# EAGLE board SNES1Chip_SCIC_IGR_D4_Takt (EAGLE 6.4)
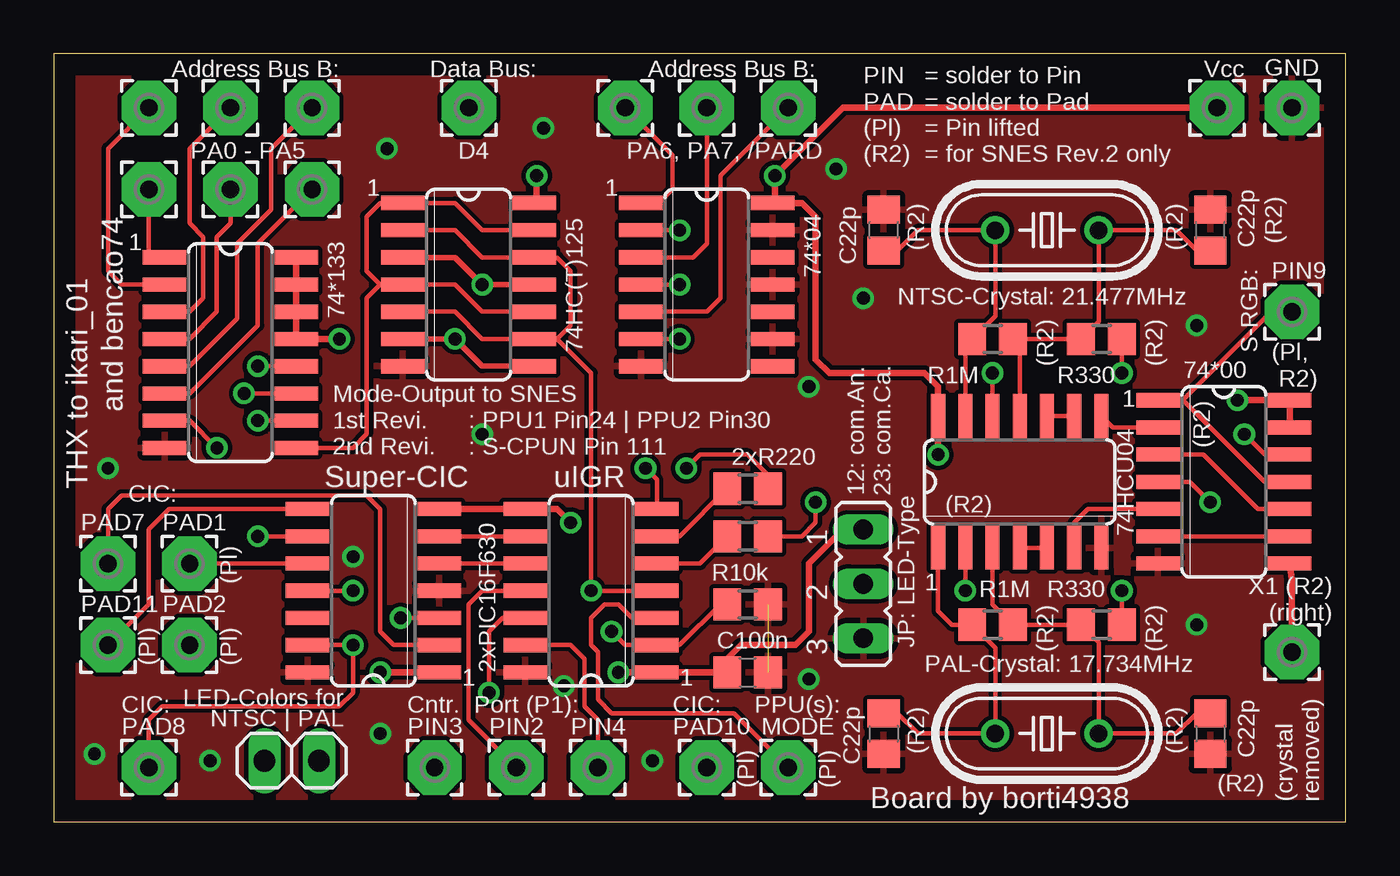
[diagram p0: board, top side]
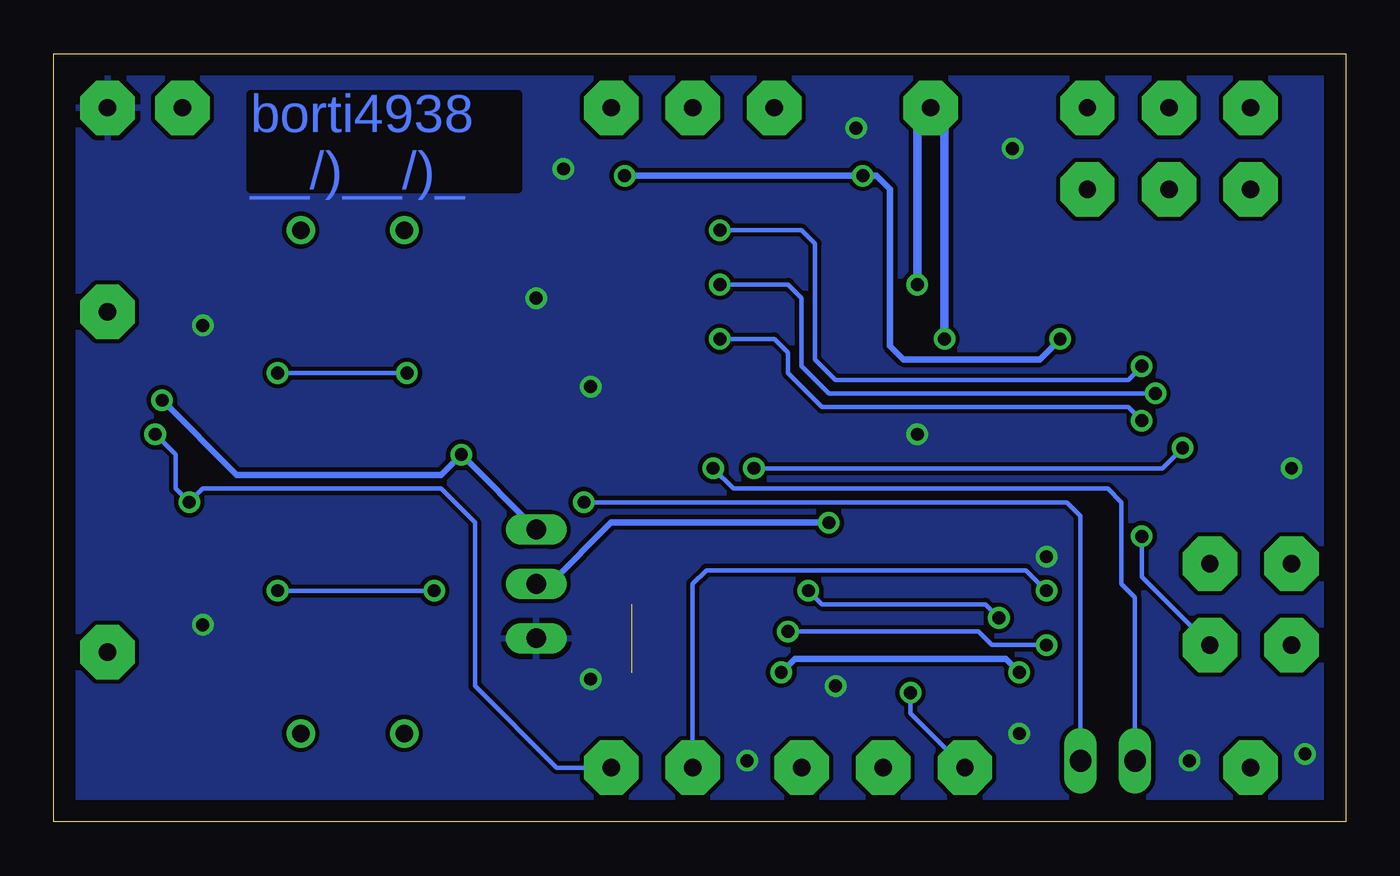
[diagram p1: board, bottom side, seen from below]

Size 60.3 x 35.87 mm. Coordinates in mm from the lower left corner, seen from the top.
Outline: 0,0 60.3,0 60.3,35.87 0,35.87 0,0
Copper layers (1*16): Top 0.035mm / dielectric 1.5mm / Bottom 0.035mm
Design rules "default *": minimum track width 8mil, minimum drill 20mil, track to track 8mil, track to pad 8mil, pad to pad 8mil, via to via 8mil, smd to smd 8mil, copper to edge 40mil, drill to drill 8mil, minimum pad ring 10mil, minimum via ring 8mil, stop-mask expansion 4mil, vias tented up to drill 0mil, thermal gap 10mil

## Footprints (pad centres in the part's own frame; a part is rotated, then mirrored left to right if it is on the bottom)
SO14 = smd 0.66 x 2.032: 1 -3.81,-3.073; 2 -2.54,-3.073; 3 -1.27,-3.073; 4 0,-3.073; 5 1.27,-3.073; 6 2.54,-3.073; 7 3.81,-3.073; 8 3.81,3.073; 9 2.54,3.073; 10 1.27,3.073; 11 0,3.073; 12 -1.27,3.073; 13 -2.54,3.073; 14 -3.81,3.073
SO16 = smd 0.66 x 2.032: 1 -4.445,-3.073; 2 -3.175,-3.073; 3 -1.905,-3.073; 4 -0.635,-3.073; 5 0.635,-3.073; 6 1.905,-3.073; 7 3.175,-3.073; 8 4.445,-3.073; 9 4.445,3.073; 10 3.175,3.073; 11 1.905,3.073; 12 0.635,3.073; 13 -0.635,3.073; 14 -1.905,3.073; 15 -3.175,3.073; 16 -4.445,3.073
2,54/0,8 = drill 0.813 pad 2.54 octagon: 1 0,0
C0805 = smd 1.3 x 1.5: 1 -0.95,0; 2 0.95,0
JP2 = drill 0.914 long: 1 -2.54,0; 2 0,0; 3 2.54,0
1X02 = drill 1.016 long: 1 -1.27,0; 2 1.27,0
HC49/S = drill 0.813: 1 -2.413,0; 2 2.413,0
R0805 = smd 1.3 x 1.5: 1 -0.95,0; 2 0.95,0

## Placement (x,y rotation side)
74*00  [SO14]  54.61,15.88 270 top
74*04  [SO14]  30.48,25.08 270 top
74*133  [SO16]  8.26,21.91 270 top
74HC(T)125  [SO14]  19.37,25.08 270 top
74HCU04  [SO14]  45.09,15.88 0 top
+5V  [2,54/0,8]  54.29,33.34 0 top
/PARD  [2,54/0,8]  34.29,33.34 0 top
C1  C100n  [C0805]  32.38,6.99 0 top
C2  C22p  [C0805]  38.73,4.13 270 top
C3  C22p  [C0805]  53.98,4.13 270 top
C4  C22p  [C0805]  38.73,27.62 90 top
C5  C22p  [C0805]  53.98,27.62 90 top
D4  [2,54/0,8]  19.37,33.34 0 top
GND  [2,54/0,8]  57.78,33.34 0 top
J1-L_TYPE  [JP2]  37.78,11.11 270 top
LED-OUT  [1X02]  11.11,2.86 0 top
MODE  [2,54/0,8]  34.29,2.54 0 top
NTSC:21.477MHZ  [HC49/S]  46.35,27.62 0 top
P0  [2,54/0,8]  12.06,29.53 0 top
P1  [2,54/0,8]  12.06,33.34 0 top
P2  [2,54/0,8]  8.26,29.53 0 top
P3  [2,54/0,8]  8.26,33.34 0 top
P4  [2,54/0,8]  4.45,33.34 0 top
P5  [2,54/0,8]  4.45,29.53 0 top
P6  [2,54/0,8]  26.67,33.34 0 top
P7  [2,54/0,8]  30.48,33.34 0 top
PAD1  [2,54/0,8]  6.35,12.06 0 top
PAD2  [2,54/0,8]  6.35,8.26 0 top
PAD7  [2,54/0,8]  2.54,12.06 0 top
PAD8  [2,54/0,8]  4.45,2.54 0 top
PAD10  [2,54/0,8]  30.48,2.54 0 top
PAD11  [2,54/0,8]  2.54,8.26 0 top
PAL:17.734MHZ  [HC49/S]  46.35,4.13 0 top
PIN2  [2,54/0,8]  21.59,2.54 0 top
PIN3  [2,54/0,8]  17.78,2.54 0 top
PIN4  [2,54/0,8]  25.4,2.54 0 top
PIN9  [2,54/0,8]  57.78,23.81 0 top
R1  R220  [R0805]  32.38,13.34 0 top
R2  R220  [R0805]  32.38,15.56 0 top
R3  R10k  [R0805]  32.38,10.16 180 top
R4  R330  [R0805]  48.9,9.21 180 top
R5  R330  [R0805]  48.9,22.54 180 top
R6  R1M  [R0805]  43.81,9.21 0 top
R7  R1M  [R0805]  43.81,22.54 0 top
RIGHT  [2,54/0,8]  57.78,7.94 0 top
S-CIC  Super-CIC  [SO14]  14.92,10.79 90 top
UIGR  uIGR  [SO14]  25.08,10.79 90 top

## Library data of the parts
74*00 74*04 74*133 74HC(T)125 74HCU04 S-CIC UIGR = 74xx-eu
+5V /PARD D4 GND MODE P0 P1-P7 PAD1 PAD2 PAD7 PAD8 PAD10 PAD11 PIN2-PIN4 PIN9 RIGHT = wirepad
C1-C5 R1-R7 = rcl
J1-L_TYPE = jumper
LED-OUT = pinhead
NTSC:21.477MHZ PAL:17.734MHZ = crystal; OC_FARNELL: 1667008; OC_NEWARK: unknown

## Nets
+5V: 74*00.13 74*00.14 74*04.14 74*133.13 74*133.14 74*133.15 74*133.16 74HC(T)125.14 74HCU04.14 +5V.1 C1.1 J1-L_TYPE.1 S-CIC.1 UIGR.1
GND: 74*00.7 74*04.7 74*04.9 74*04.11 74*04.13 74*133.8 74HC(T)125.7 74HCU04.7 C1.2 C2.2 C3.2 C4.2 C5.2 GND.1 J1-L_TYPE.3 R3.1 S-CIC.4 S-CIC.14 UIGR.14
N$1: 74*04.4 74*133.11
N$2: 74*133.9 74HC(T)125.1 74HC(T)125.4 74HC(T)125.10 74HC(T)125.13
N$3: PAD10.1 S-CIC.11
N$4: PAD11.1 S-CIC.8
N$5: LED-OUT.1 R2.2
N$6: 74*04.1 P6.1
N$7: R2.1 UIGR.6
N$8: J1-L_TYPE.2 S-CIC.7 UIGR.8
N$9: 74*04.6 74*133.10
N$10: PAD7.1 S-CIC.2
N$11: R1.1 UIGR.5
N$12: PAD2.1 S-CIC.9
N$13: PAD1.1 S-CIC.10
N$14: LED-OUT.2 R1.2
N$15: 74*133.6 P0.1
N$16: 74*04.3 P7.1
N$17: PIN2.1 UIGR.11
N$18: PIN3.1 UIGR.12
N$19: PIN4.1 UIGR.13
N$20: 74*04.2 74*133.12
N$21: 74*133.1 P5.1
N$22: 74*133.2 P4.1
N$23: S-CIC.6 UIGR.9
N$24: 74*133.3 P3.1
N$25: 74*133.4 P2.1
N$26: 74*04.5 /PARD.1
N$27: 74HCU04.1 C2.1 PAL:17.734MHZ.1 R6.1
N$28: 74HCU04.3 C3.1 PAL:17.734MHZ.2 R4.2 R6.2
N$29: 74HCU04.13 C4.1 NTSC:21.477MHZ.1 R7.1
N$30: 74HCU04.11 C5.1 NTSC:21.477MHZ.2 R5.2 R7.2
N$31: 74*00.3 74*00.10
N$32: 74*00.6 74*00.9
N$33: 74*00.4 74*00.12 MODE.1 UIGR.3
N$34: PAD8.1 R3.2 S-CIC.13 UIGR.2
N$35: 74*00.1 74*00.11 PIN9.1
N$36: 74*00.8 RIGHT.1
N$37: 74HCU04.2 R4.1
N$38: 74HCU04.4 74HCU04.5
N$39: 74*00.5 74HCU04.6
N$40: 74*133.5 P1.1
N$41: 74*00.2 74HCU04.8
N$42: 74HC(T)125.3 74HC(T)125.6 74HC(T)125.8 74HC(T)125.11 D4.1
N$43: 74*133.7 UIGR.7
N$44: 74HCU04.9 74HCU04.10
N$50: 74HCU04.12 R5.1
N$53: S-CIC.5 UIGR.10
UIGR: 74HC(T)125.2 74HC(T)125.5 74HC(T)125.9 74HC(T)125.12 S-CIC.3 UIGR.4

## Tracks (layer width: path | path; a pad name or v marks a point on that pad's centre or on a via)
+5V  (via drill 0.6)
  Top 0.305: 33.02,28.89 74*04.14 | 21.91,28.89 74HC(T)125.14 22.54,28.89 v22.54,30.16 | 74*00.13 74*00.14 v55.24,19.68 | v41.27,17.14 41.27,18.31 41.17,18.41 74HCU04.14 41.27,20.32 40.64,20.95 36.2,20.95 35.56,21.59 35.56,28.26 34.92,28.89 74*04.14 | 74*133.16 74*133.15 74*133.14 74*133.13 v13.34,22.54 | 74*04.14 33.66,28.99 v33.66,30.16 36.83,33.34 +5V.1 | v26.35,6.99 UIGR.1 C1.1 31.43,7.62 32.07,8.26 34.61,8.26 35.24,8.89 35.24,12.06 36.83,13.65 J1-L_TYPE.1 | S-CIC.1 v15.24,6.99
  Bottom 0.305: v55.24,19.68 51.75,16.19 42.23,16.19 v41.27,17.14 J1-L_TYPE.1 | v33.66,30.16 v22.54,30.16 21.91,30.16 21.27,29.53 21.27,22.23 20.64,21.59 14.29,21.59 v13.34,22.54 | v15.24,6.99 15.88,7.62 25.72,7.62 v26.35,6.99
GND  (via drill 0.6)  (1 unrouted)
  Top 0.305: C2.2
  other vias: 37.78,24.45 53.34,23.18 13.97,12.38 1.91,3.17 36.51,30.48 27.94,2.86 15.24,4.13 35.24,20.32 23.81,6.35 53.34,9.21 15.56,31.43 2.54,16.51 35.24,6.67 7.3,2.86 20,18.1 22.86,32.38
  pour Bottom: 0,35.88 60.33,35.88 60.33,0 0,0
  pour Top: 0,35.88 60.33,35.88 60.33,0 0,0
N$1  (via drill 0.6)
  Top 0.203: 74*04.4 v29.21,25.08 | 74*133.11 v8.89,20
  Bottom 0.203: v29.21,25.08 26.04,25.08 25.4,24.45 25.4,21.27 24.13,20 v8.89,20
N$2
  Top 0.203: 74HC(T)125.10 20,23.81 18.73,25.08 74HC(T)125.4 15.24,25.08 | 74HC(T)125.13 20,27.62 18.73,28.89 74HC(T)125.1 15.24,28.89 14.61,28.26 14.61,25.72 15.24,25.08 | 74*133.9 13.97,17.46 14.61,18.1 14.61,24.45 15.24,25.08
N$3  (via drill 0.6)
  Top 0.203: S-CIC.11 v13.97,10.79
  Bottom 0.203: PAD10.1 30.48,11.11 29.84,11.75 14.92,11.75 v13.97,10.79
N$4
  Top 0.203: S-CIC.8 5.4,14.61 4.45,13.65 4.45,10.16 PAD11.1
N$5  (via drill 0.6)
  Top 0.203: R2.2 33.34,16.2 32.38,17.14 30.16,17.14 v29.53,16.51
  Bottom 0.203: v29.53,16.51 28.57,15.56 11.11,15.56 10.48,14.92 10.48,11.11 9.84,10.48 LED-OUT.1
N$6
  Top 0.203: 27.3,28.99 74*04.1 | 26.67,28.89 74*04.1 | P6.1 28.89,31.11 28.89,29.53 28.26,28.89 74*04.1
N$7
  Top 0.203: UIGR.6 29.21,13.34 R2.1
N$8  (via drill 0.6)
  Top 0.305: S-CIC.7 UIGR.8 23.5,14.61 v24.13,13.97
  Bottom 0.305: v24.13,13.97 34.29,13.97 37.15,11.11 J1-L_TYPE.2
N$9  (via drill 0.6)
  Top 0.203: 26.99,22.54 74*04.6 v29.21,22.54 | v9.53,18.73 74*133.10
  Bottom 0.203: v29.21,22.54 26.67,22.54 26.04,21.91 26.04,20.95 24.45,19.37 10.16,19.37 v9.53,18.73
N$10
  Top 0.203: PAD7.1 2.54,14.61 3.17,15.24 14.61,15.24 15.24,14.61 15.24,8.89 15.88,8.26 S-CIC.2
N$11
  Top 0.203: UIGR.5 30.16,12.06 R1.1
N$12  (via drill 0.6)
  Top 0.203: S-CIC.9 v9.53,13.34
  Bottom 0.203: v9.53,13.34 9.53,11.43 PAD2.1
N$13
  Top 0.203: S-CIC.10 PAD1.1
N$14  (via drill 0.6)
  Top 0.203: R1.2 34.92,13.34 35.56,13.97 v35.56,14.92
  Bottom 0.203: v35.56,14.92 13.02,14.92 12.38,14.29 LED-OUT.2
N$15
  Top 0.203: 74*133.6 6.35,20 9.53,23.18 9.53,26.99 P0.1
N$16
  Top 0.203: 74*04.3 29.84,26.35 30.48,26.99 P7.1
N$17
  Top 0.203: UIGR.11 20,10.79 19.37,10.16 19.37,4.76 PIN2.1
N$18  (via drill 0.6)
  Top 0.203: UIGR.12 20.95,9.53 20.32,8.89 v20.32,6.03
  Bottom 0.203: PIN3.1 20.32,5.08 v20.32,6.03
N$19
  Top 0.203: PIN4.1 25.4,4.76 24.77,5.4 24.77,7.62 24.13,8.26 UIGR.13
N$20  (via drill 0.6)
  Top 0.203: 74*04.2 v29.21,27.62 | v9.53,21.27 74*133.12
  Bottom 0.203: v9.53,21.27 10.16,20.64 23.81,20.64 24.77,21.59 24.77,26.99 25.4,27.62 v29.21,27.62
N$21
  Top 0.203: 5.71,26.35 74*133.1 4.45,26.35 P5.1
N$22
  Top 0.203: 74*133.2 3.17,25.08 2.54,25.72 2.54,31.43 P4.1
N$23
  Top 0.203: S-CIC.6 UIGR.9
N$24
  Top 0.203: 74*133.3 6.35,23.81 6.99,24.45 6.99,27.3 6.35,27.94 6.35,31.43 P3.1
N$25
  Top 0.203: 74*133.4 6.35,22.54 7.62,23.81 7.62,27.3 8.26,27.94 P2.1
N$26
  Top 0.203: /PARD.1 31.11,30.16 31.11,24.45 30.48,23.81 74*04.5
N$27
  Top 0.203: 74HCU04.1 41.27,9.84 41.91,9.21 R6.1 43.94,8.13 PAL:17.734MHZ.1 40.32,4.13 39.37,5.08 C2.1
N$28
  Top 0.203: C3.1 53.34,5.08 52.39,4.13 PAL:17.734MHZ.2 48.77,8.38 R4.2 R6.2 43.81,10.16 74HCU04.3
N$29
  Top 0.203: 74HCU04.13 42.55,22.22 R7.1 43.94,23.62 NTSC:21.477MHZ.1 40.32,27.62 39.37,26.67 C4.1
N$30
  Top 0.203: C5.1 53.34,26.67 52.39,27.62 NTSC:21.477MHZ.2 48.77,23.37 R5.2 R7.2 45.09,22.22 74HCU04.11 45.09,18.41
N$31
  Top 0.203: 74*00.3 53.66,17.14 56.2,14.61 74*00.10
N$32
  Top 0.203: 74*00.6 74*00.9
N$33  (via drill 0.6)
  Top 0.203: 74*00.4 53.02,15.88 v53.98,14.92 | v55.56,18.1 56.52,17.14 74*00.12 | UIGR.3 26.99,9.53 26.35,10.16 25.72,10.16 25.08,9.53 25.08,8.26 25.4,7.94 25.4,5.71 26.04,5.08 31.75,5.08 MODE.1
  Bottom 0.203: MODE.1 36.83,2.54 40.64,6.35 40.64,13.97 42.23,15.56 53.34,15.56 v53.98,14.92 54.61,15.56 54.61,17.14 v55.56,18.1
N$34  (via drill 0.6)
  Top 0.203: R3.2 31.11,10.16 29.21,8.26 UIGR.2 26.67,8.26 v26.04,8.89 | S-CIC.13 v13.97,8.26 13.97,6.03 13.34,5.4 5.08,5.4 4.45,4.76 PAD8.1
  Bottom 0.203: v13.97,8.26 16.51,8.26 17.14,8.89 v26.04,8.89
N$35
  Top 0.203: 74*00.11 56.52,15.88 52.7,19.68 | 52.7,19.68 74*00.1 | PIN9.1 56.83,23.81 52.7,19.68
N$36
  Top 0.305: RIGHT.1 57.78,11.33 74*00.8
N$37  (via drill 0.6)
  Top 0.203: v49.85,10.79 R4.1 | v42.55,10.79 74HCU04.2
  Bottom 0.203: v49.85,10.79 v42.55,10.79
N$38
  Top 0.203: 74HCU04.4 74HCU04.5
N$39
  Top 0.203: 74*00.5 48.26,14.61 47.62,13.97 74HCU04.6
N$40
  Top 0.203: 74*133.5 6.35,21.27 8.57,23.5 8.57,26.99 10.16,28.57 10.16,31.43 P1.1
N$41
  Top 0.203: 74*00.2 49.43,18.41 74HCU04.8
N$42  (via drill 0.6)
  Top 0.254: 74HC(T)125.6 v18.73,22.54 20,21.27 74HC(T)125.8 | 74HC(T)125.11 v20,25.08 18.73,26.35 74HC(T)125.3
  Bottom 0.406: v18.73,22.54 18.73,32.7 D4.1 20,32.7 v20,25.08
N$43  (via drill 0.6)
  Top 0.203: UIGR.7 28.16,15.98 v27.62,16.51 | v7.62,17.46 6.35,18.73 74*133.7
  Bottom 0.203: v27.62,16.51 8.57,16.51 v7.62,17.46
N$44
  Top 0.203: 74HCU04.10 74HCU04.9
N$50  (via drill 0.6)
  Top 0.203: v49.85,20.95 R5.1 | v43.81,20.95 74HCU04.12
  Bottom 0.203: v49.85,20.95 v43.81,20.95
N$53
  Top 0.203: S-CIC.5 UIGR.10
UIGR  (via drill 0.6)
  Top 0.203: 74HC(T)125.2 18.73,27.62 20,26.35 74HC(T)125.12 23.5,26.35 24.13,25.72 24.13,23.18 23.5,22.54 | 74HC(T)125.5 18.73,23.81 20,22.54 74HC(T)125.9 23.5,22.54 | S-CIC.3 v16.19,9.53 | UIGR.4 v25.08,10.79 25.08,20.95 23.5,22.54
  Bottom 0.203: v25.08,10.79 24.45,10.16 16.83,10.16 v16.19,9.53

## Text on the board
Bottom: borti4938 / __/)__/)_
tNames: Address Bus B: | Data Bus: | Address Bus B: | Vcc | PA0 - PA5 | D4 | PA6, PA7, /PARD | PIN / PAD / (Pl) / (R2) | = solder to Pin / = solder to Pad / = Pin lifted / = for SNES Rev.2 only | 1 | 1 | (R2) | and bencao74 | 1 | (R2) | (R2) | NTSC-Crystal: 21.477MHz | S-RGB: | (R2) | (R2) | (Pl, / R2) | 1 | Mode-Output to SNES / 1st Revi. / 2nd Revi. | : PPU1 Pin24 | PPU2 Pin30 / : S-CPUN Pin 111 | 2xR220 | (R2) | THX to ikari_01 | CIC: | 12: com.An. / 23: com.Ca. | JP: LED-Type | (R2) | (Pl) | 1 | X1 (R2) / (right) | (R2) | (R2) | (Pl) | (Pl) | 2xPIC16F630 | PAL-Crystal: 17.734MHz | 1 | 1 | CIC: | LED-Colors for | Cntr. Port (P1): | CIC: | PPU(s): | NTSC | PAL | (R2) | (R2) | (Pl) | (Pl) | (R2) | Board by borti4938 | (crystal / removed)